# Altium PCB DS130-1.02 G-M传感器.PcbDoc
Units mil, origin at the board's own origin, x right, y up, seen from the top; angles counter-clockwise.
Board outline 1614.17 x 2519.69 mil, 2 copper layers (Top Layer, Bottom Layer), stack 62.249 mil thick; 52 components, 35 nets, 200 pads, 44 vias.
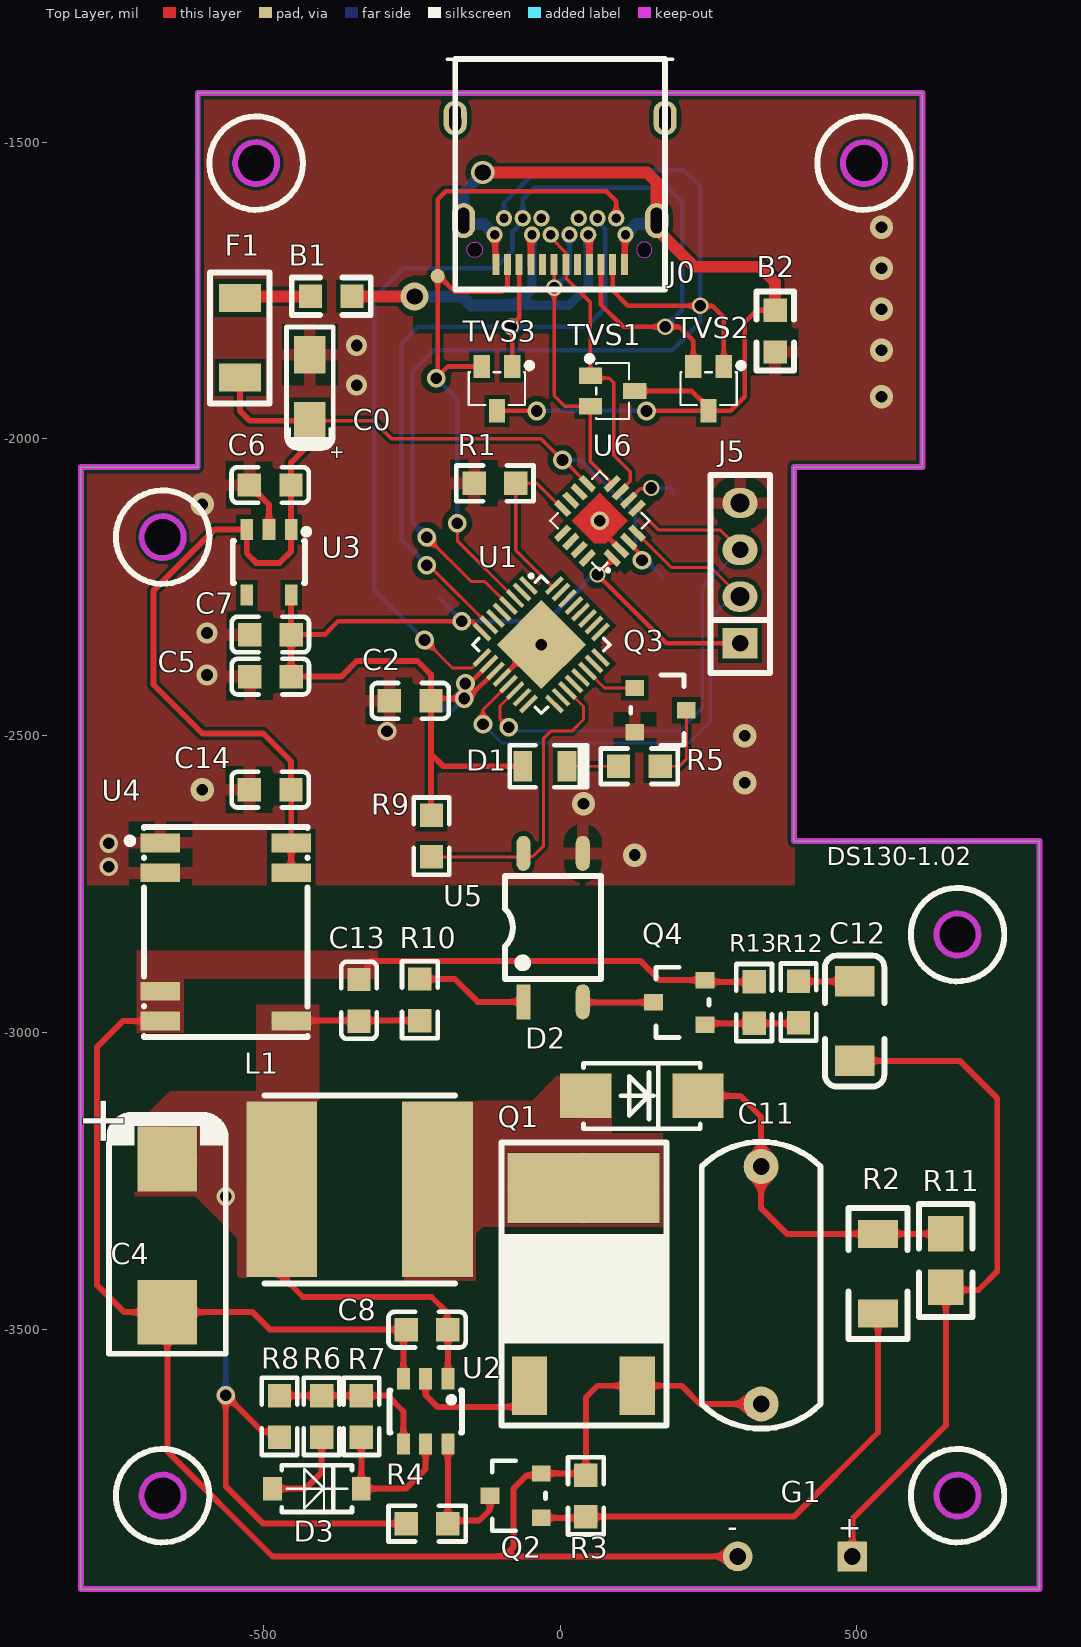
[diagram p0: Top Layer view]
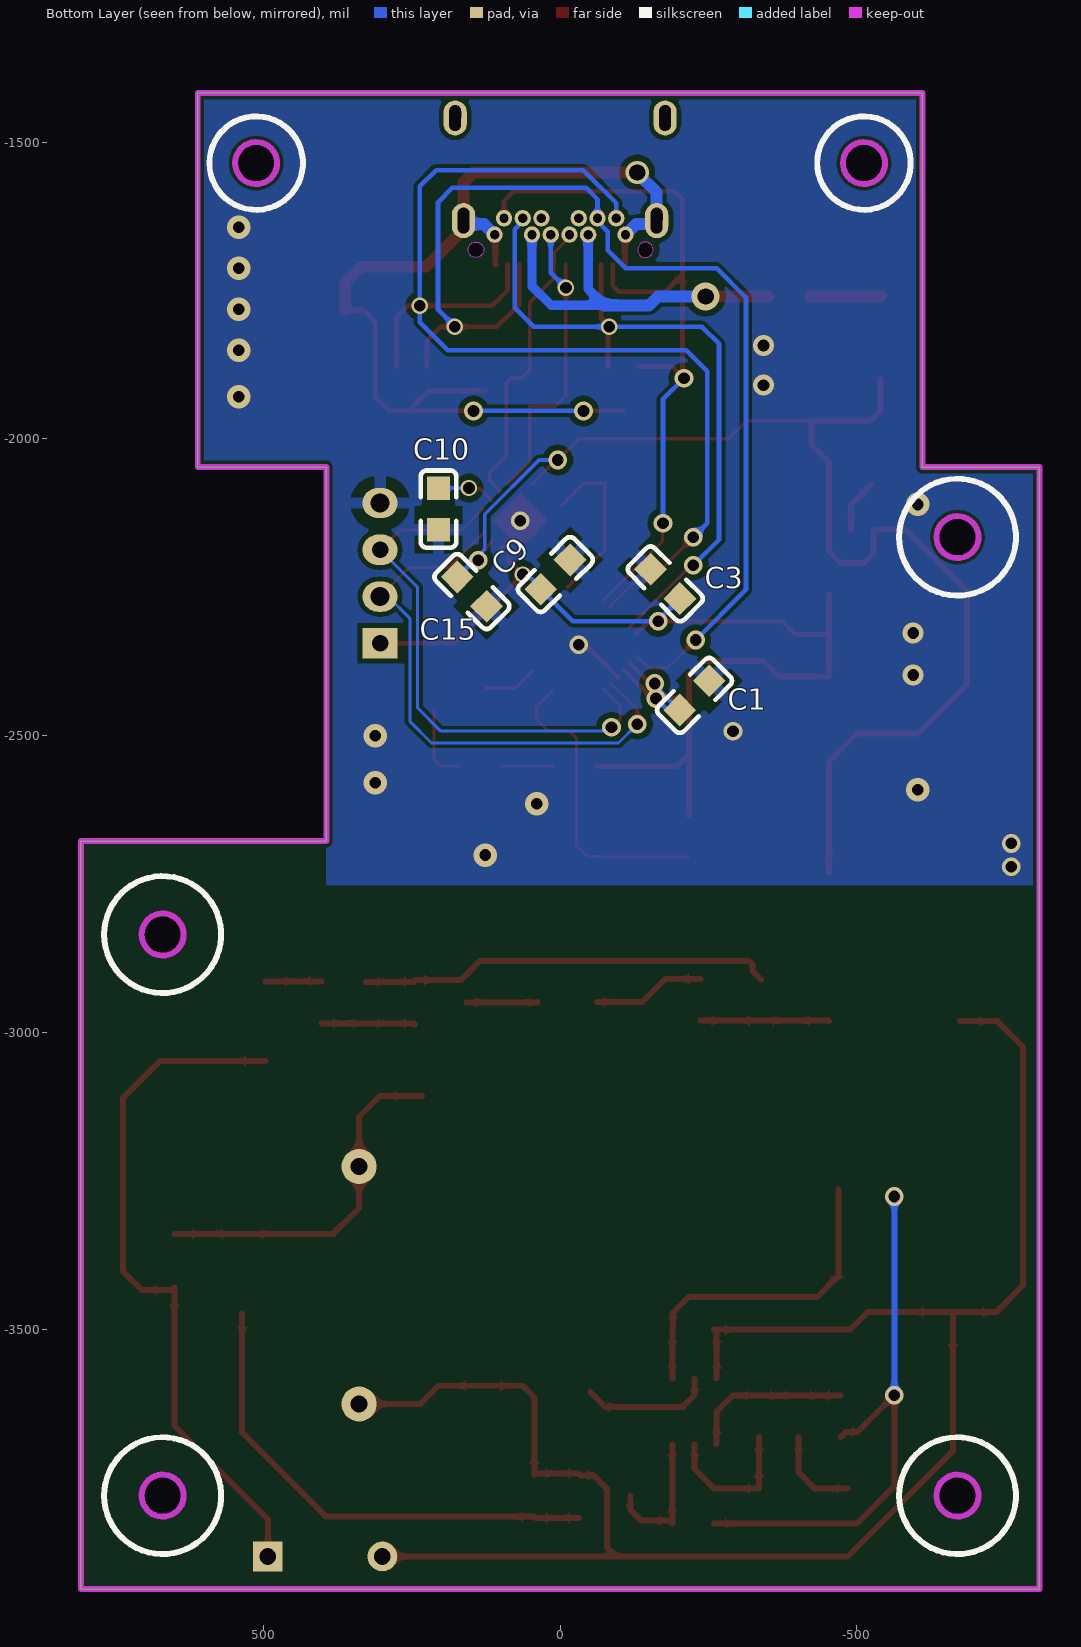
[diagram p1: Bottom Layer view, seen from below]

## Layer stack, top to bottom
Top Solder: solder mask 0.4, Solder Resist, Dk 3.5
Top Layer: signal copper 1.4
Dielectric 1: dielectric 59.4488, FR-4, Dk 4.8
Bottom Layer: signal copper 1.4
Bottom Solder: solder mask 0.4, Solder Resist, Dk 3.5

## Board outline
-807.09,-3937.01 -807.09,-2047.24 -610.24,-2047.24 -610.24,-1417.32 610.24,-1417.32 610.24,-2047.24 393.7,-2047.24 393.7,-2677.17 807.09,-2677.17 807.09,-3937.01
cut-out: -704.72,-2165.35 ccw(c-669.29,-2165.35) -669.29,-2200.79 ccw(c-669.29,-2165.35) -633.86,-2165.35 ccw(c-669.29,-2165.35) -669.29,-2129.92 ccw(c-669.29,-2165.35)
cut-out: 633.86,-3779.53 ccw(c669.29,-3779.53) 669.29,-3814.96 ccw(c669.29,-3779.53) 704.72,-3779.53 ccw(c669.29,-3779.53) 669.29,-3744.09 ccw(c669.29,-3779.53)
cut-out: -704.72,-3779.53 ccw(c-669.29,-3779.53) -669.29,-3814.96 ccw(c-669.29,-3779.53) -633.86,-3779.53 ccw(c-669.29,-3779.53) -669.29,-3744.09 ccw(c-669.29,-3779.53)
cut-out: 633.86,-2834.65 ccw(c669.29,-2834.65) 669.29,-2870.08 ccw(c669.29,-2834.65) 704.72,-2834.65 ccw(c669.29,-2834.65) 669.29,-2799.21 ccw(c669.29,-2834.65)
cut-out: 476.38,-1535.43 ccw(c511.81,-1535.43) 511.81,-1570.87 ccw(c511.81,-1535.43) 547.24,-1535.43 ccw(c511.81,-1535.43) 511.81,-1500 ccw(c511.81,-1535.43)
cut-out: -547.24,-1535.43 ccw(c-511.81,-1535.43) -511.81,-1570.87 ccw(c-511.81,-1535.43) -476.38,-1535.43 ccw(c-511.81,-1535.43) -511.81,-1500 ccw(c-511.81,-1535.43)

## Design rules (kind name [scope] priority, off if disabled: settings)
Clearance [All] p1: gap=7.87 ignorepadtopadclearanceinfootprint=FALSE except(0: Arc-Hole Track-Hole SMDPad-Hole THPad-Hole Via-Hole Fill-Hole Poly-Hole Region-Hole Text-Hole; 3.94: THPad-THPad; 5.91: Arc-SMDPad Arc-THPad Arc-Fill Arc-Poly Arc-Region Track-SMDPad Track-THPad Track-Fill Track-Poly Track-Region SMDPad-SMDPad; 10: THPad-Via Via-Fill Via-Poly Via-Region Fill-Fill Fill-Poly Fill-Region Poly-Poly Poly-Region Region-Region)
MinimumSolderMaskSliver [All] p1: minsoldermaskwidth=7.87
PlaneConnect [All] p1: planeconnectstyle=Relief reliefexpansion=20 reliefentries=4 reliefconductorwidth=10 reliefairgap=20
PolygonConnect PGND [InNet('PGND') vs InNet('PGND')] p1: thpad.connectstyle=Relief thpad.reliefconductorwidth=20 thpad.reliefentries=4 thpad.polygonreliefangle="90 Angle" thpad.airgapwidth=20 smdpad.connectstyle=Relief smdpad.reliefconductorwidth=20 smdpad.reliefentries=4 smdpad.polygonreliefangle="90 Angle" smdpad.airgapwidth=20 via.connectstyle=Direct via.reliefconductorwidth=10 via.reliefentries=4 via.polygonreliefangle="90 Angle" via.airgapwidth=10
PolygonConnect GND [InNet('GND') vs InNet('GND')] p2: thpad.connectstyle=Relief thpad.reliefconductorwidth=20 thpad.reliefentries=4 thpad.polygonreliefangle="90 Angle" thpad.airgapwidth=20 smdpad.connectstyle=Relief smdpad.reliefconductorwidth=20 smdpad.reliefentries=4 smdpad.polygonreliefangle="90 Angle" smdpad.airgapwidth=20 via.connectstyle=Direct via.reliefconductorwidth=10 via.reliefentries=4 via.polygonreliefangle="90 Angle" via.airgapwidth=10
RoutingVias [All] p1: holewidth=15.75 width=31.5 viastyle="Through Hole" minholewidth=7.87 minwidth=15.75 maxholewidth=39.37 maxwidth=78.74
SilkToSilkClearance [All] p1: silktosilkclearance=3.94
SilkToSolderMaskClearance [IsPad] p1: minsilkscreentomaskgap=1.97 clearancetoexposedcopper=TRUE
SolderMaskExpansion [All] p1: expansion=4 istentingtop=FALSE
Width [All] p1: maxlimit=40 minlimit=5 preferedwidth=10 minimp=50.000000 maximp=50.000000 favimp=50.000000
26 further rules are at their usual default settings.

## Components (designator, comment, footprint, x,y, rotation, side; value= is the part's Value field where it differs from the comment)
B1 "CBM160808U102" 0603BEAD -385.39,-1759.84 r180 top
B2 "CBM160808U102" 0603BEAD 362.57,-1818.53 r270 top
C0 "AVX_10uF/16V ±10％(C106)" AVX_3216-18(1206)_SMD -421.26,-1913.78 r90 top value=10uF
C1 "SMDCAP00013" 0603CAP -226.39,-2431.92 r315 bottom value=100nF
C2 "SMDCAP00012" 0603CAP -252.4,-2440.94 r0 top value=4.7uF
C3 "SMDCAP00015" 0603CAP -177.17,-2244.09 r225 bottom value=1uF
C4 "AVX_220uF/16V ±10％(C227)" AVX_7343-31(2917)_SMD -661.42,-3339.37 r270 top value=220uF
C5 "SMDCAP00013" 0603CAP -487.88,-2400.31 r0 top value=100nF
C6 "SMDCAP00015" 0603CAP -488.27,-2077.47 r0 top value=1uF
C7 "SMDCAP00015" 0603CAP -487.88,-2329.44 r0 top value=1uF
C8 "SMDCAP00013" 0603CAP -224.02,-3500 r0 top value=100nF
C9 "SMDCAP00015" 0603CAP 7.87,-2228.35 r135 bottom value=1uF
C10 "SMDCAP00013" 0603CAP 204.72,-2118.11 r90 bottom value=100nF
C11 "DIPCAP03003" DIP_CL_10.16mm 338.58,-3425.2 r270 top value=100nF
C12 "MLCC 47pF 1kV ±5％ 1206" 1206CAP 496.06,-2980.31 r90 top value=47pF
C13 "SMDCAP00016" 0603CAP -338.58,-2945.28 r270 top value=10uF
C14 "SMDCAP00012" 0603CAP -488.19,-2590.55 r0 top value=4.7uF
C15 "SMDCAP00015" 0603CAP 148.45,-2257.06 r45 bottom value=1uF
D1 "SMDLED00010" LED_0805 -25.59,-2551.18 r0 top value=BLUE
D2 "US1M-DO-214AC" SMA/DO-214AC 137.8,-3106.3 r0 top value=US1M
D3 "DIPDIODE02001" SOD-123 -409.45,-3767.72 r0 top value=1N4148
F1 "SMD1206-050C-16V" 1206FUSE -539.37,-1829.84 r270 top value="16V /0.5A"
G1 "M4011盖革管" M4011-90 944.88,-4429.13 r0 top
J0 "USB_Type_C_24P" USB_TYPE_C_24P_Receptacle 0,-1582.68 r180 top locked
J5 "DIP4单排直针  间距2mm 针长11mm 铜" H4 303.15,-2344.16 r90 top value=4P
L1 "SMD_220uH 8.0*8.0" IND-SMD_L8.0-W8.0 -333.03,-3267.44 r0 top value=220uH
Q1 "XKT-1050" TO-252 39.37,-3476.38 r270 top
Q2 "MMBTA44" SOT23 -74.8,-3779.53 r90 top value=MMBTA44-400V
Q3 "SMDIC000037" SOT23 169.29,-2456.69 r270 top value=DTC114ECA
Q4 "MMBT3904" SOT23 200.79,-2948.82 r90 top value=MMBT3904-40V
R1 "Chip 4.7K 1/16W ±1％ 0603" 0603RES -109.8,-2074.8 r0 top value=4.7K
R2 "Chip 4.7M 1/4W ±1％ 1206 500V" 1206RES 535.43,-3405.51 r90 top value=4.7M
R3 "Chip 5.49K 1/10W ±1％ 0603" 0603RES 43.31,-3779.96 r270 top value=5.49K
R4 "SMDRES00058" 0603RES -223.98,-3826.77 r180 top value=20K
R5 "SMDRES00030" 0603RES 133.43,-2551.18 r0 top value=510R
R6 "SMDRES00058" 0603RES -401.57,-3646.1 r270 top value=20K
R7 "SMDRES00085" 0603RES -334.65,-3646.1 r270 top value=1M
R8 "SMDRES00075" 0603RES -472.44,-3646.1 r90 top value=200K
R9 "Chip 4.7K 1/16W ±1％ 0603" 0603RES -216.54,-2668.86 r90 top value=4.7K
R10 "SMDRES00042" 0603RES -236.22,-2944.45 r90 top value=2K
R11 "Chip 1M 1/10W ±1％ 0805 400V" 0805RES 649.61,-3383.58 r90 top value=1M
R12 "SMDRES00108" 0603RES 401.57,-2948.39 r270 top value=22K
R13 "SMDRES00071" 0603RES 326.77,-2949.25 r270 top value=100K
TVS1 "TPD2E2U06DCKR" SC-70-3_L2.0-W1.3-P0.65-LS2.1-BL 88.58,-1919.28 r270 top
TVS2 "TPD2E2U06DCKR" SC-70-3_L2.0-W1.3-P0.65-LS2.1-BL 249.99,-1915.35 r180 top
TVS3 "TPD2E2U06DCKR" SC-70-3_L2.0-W1.3-P0.65-LS2.1-BL -106.3,-1915.35 r180 top
U1 "STC32G12K128_35I QFN32" QFN-32-L4.0-W4.0 -31.5,-2346.46 r315 top value=STC32G12K128
U2 "XKT-203" SOT23-6 -226.38,-3637.79 r180 top
U3 "ME6211C33M5G-N" SOT23-5 -490.24,-2207.39 r180 top
U4 "B0505MT-1WR4" DFN-14_7P_L9.0-W7.0-P1.27-BL_B0505MT-1WR4 -673.23,-2680.31 r270 top
U5 "EL357N" SO-4 -11.81,-2822.83 r90 top
U6 "CH343P" QFN-16_L3_W3 66.93,-2137.8 r45 top

## Footprints (in the part's own frame and the unit in brackets; to place one, negate y for a bottom-side part, rotate by r counter-clockwise, add the part's x,y. Pads: shape width x height; smd on the part's side, far side on the other; paste and mask are expansions set on the pad)
0603BEAD [mm]
  rect 1x1 smd: 1(-0.889,0) 2(0.889,0)
  silkscreen extent -1.69,-0.8 1.69,0.8, body extent -0.9,-0.48 0.85,0.48, height 0.95
0603CAP [mm]
  rect 1x1 smd: 1(-0.889,0) 2(0.89,0)
  silkscreen extent -1.65,-0.76 1.65,0.76, body extent -0.8,-0.4 0.8,0.4, height 0.3
0603RES [mm]
  rect 1x1 smd: 1(-0.889,0) 2(0.889,0)
  silkscreen extent -1.65,-0.76 1.65,0.76, body extent -0.8,-0.41 0.8,0.41, height 0.51
0805RES [mil]
  rect 60x60 smd: 1(-45,0) 2(45,0)
  silkscreen extent -95,-45 95,45, body extent -55,-25 55,25, height 32
1206CAP [mm]
  rect 1.3x1.7 smd: 1(-1.7,0) 2(1.7,0)
  silkscreen extent -2.8,-1.27 2.8,1.27, body extent -1.7,-0.9 1.7,0.9, height 1.8
1206FUSE [mm]
  rect 1.2x1.8 smd: 1(-1.7,0) 2(1.7,0)
  silkscreen extent -2.8,-1.27 2.8,1.27, body extent -1.6,-0.83 1.6,0.83, height 1.46
1206RES [mm]
  rect 1.2x1.7 smd: 1(-1.7,0) 2(1.7,0)
  silkscreen extent -2.8,-1.27 2.8,1.27, body extent -1.6,-0.8 1.57,0.75, height 0.61
AVX_3216-18(1206)_SMD [mm]
  rect 1.6x1.35 smd: 1(-1.41,0) 2(1.41,0)
  silkscreen extent -2.6,-1 2.6,1, body extent -1.7,-0.84 1.7,0.84, height 1.71
AVX_7343-31(2917)_SMD [mm]
  rect 2.77x2.55 smd: 1(-3.22,0) 2(3.33,0)
  silkscreen extent -5.11,-2.5 5.11,2.5, body extent -3.7,-2.22 3.7,2.22, height 3.01
DFN-14_7P_L9.0-W7.0-P1.27-BL_B0505MT-1WR4 [mm]
  rect 0.8x1.7 smd paste+0.051: 1(0,0) 2(1.27,0) 6(6.35,0) 7(7.62,0) 8(7.62,5.6) 13(1.27,5.6) 14(0,5.6)
  silkscreen extent -0.69,-1.44 8.31,6.3
DIP_CL_10.16mm [mm]
  round 1.5 hole 0.711: 1(-5.08,0) 2(5.08,0)
  silkscreen extent -6.13,-2.54 6.13,2.54, body extent -6.13,-2.54 6.13,2.54, height 8
H4 [mm]
  rect 1.3x1.5 hole 0.7: 1(0,0)
  oval 1.3x1.5 hole 0.813: 2(2,0) 4(6,0)
  oval 1.3x1.5 hole 0.7: 3(4,0)
  silkscreen extent -1.27,-1.27 7.2,1.27, body extent -0.97,-1 6.98,1, height 6
IND-SMD_L8.0-W8.0 [mm]
  rect 3.024x7.5 smd: 1(3.215,0.093) 2(-3.441,0.093)
  silkscreen extent -4.19,-3.93 3.96,4.11
LED_0805 [mm]
  rect 0.8x1.3 smd: 1(-0.95,0) 2(0.95,0)
  silkscreen extent -1.5,-0.9 1.8,0.9, body extent -1,-0.45 1.06,0.45, height 0.85
M4011-90 [mm]
  rect 1.27x1.27 hole 0.711 paste+0 mask+0.102: 1(-11.5,13.9)
  round 1.27 hole 0.711 paste+0 mask+0.102: 2(-16.4,13.9)
QFN-16_L3_W3 [mm]
  rect 0.28x0.8 smd paste-100 mask+0.051: 1(-0.749,-1.5) 2(-0.249,-1.5) 3(0.249,-1.5) 4(0.749,-1.5) 9(0.749,1.5) 10(0.249,1.5) 11(-0.249,1.5) 12(-0.749,1.5)
  rect 0.8x0.28 smd paste-100 mask+0.051: 5(1.5,-0.749) 6(1.5,-0.249) 7(1.5,0.249) 8(1.5,0.749) 13(-1.5,0.749) 14(-1.5,0.249) 15(-1.5,-0.249) 16(-1.5,-0.749)
  round 0.34 smd: 17(0,0)
  Top Layer region: -0.85,-0.5 -0.85,0.85 0.85,0.85 0.85,-0.85 -0.5,-0.85 -0.85,-0.5
  silkscreen extent -1.5,-1.76 1.5,1.5
QFN-32-L4.0-W4.0 [mm]
  rect 0.96x0.2 smd paste-100 mask+0.051: 1(-2.18,1.4) 2(-2.18,1) 3(-2.18,0.6) 4(-2.18,0.2) 5(-2.18,-0.2) 6(-2.18,-0.6) 7(-2.18,-1) 8(-2.18,-1.4) 17(2.18,-1.4) 18(2.18,-1) 19(2.18,-0.6) 20(2.18,-0.2) 21(2.18,0.2) 22(2.18,0.6) 23(2.18,1) 24(2.18,1.4)
  rect 0.2x0.96 smd paste-100 mask+0.051: 9(-1.4,-2.18) 10(-1,-2.18) 11(-0.6,-2.18) 12(-0.2,-2.18) 13(0.2,-2.18) 14(0.6,-2.18) 15(1,-2.18) 16(1.4,-2.18) 25(1.4,2.18) 26(1,2.18) 27(0.6,2.18) 28(0.2,2.18) 29(-0.2,2.18) 30(-0.6,2.18) 31(-1,2.18) 32(-1.4,2.18)
  rect 2.7x2.7 smd paste-100 mask+0.051: 33(0,0)
  silkscreen extent -2.46,-2.08 2.08,2.08
SC-70-3_L2.0-W1.3-P0.65-LS2.1-BL [mm]
  rect 0.7x1 smd paste+0.051: 1(-0.65,-0.95) 2(0.65,-0.95) 3(0,0.95)
  silkscreen extent -1.63,-1.23 1.2,0.7
SMA/DO-214AC [mm]
  rect 2.2x1.9 smd: 1(-2.4,0) 2(2.4,0)
  silkscreen extent -2.5,-1.4 2.5,1.4, body extent -2.74,-1.4 2.74,1.4, height 2.28
SO-4 [mm]
  rect 1.5x0.6 smd mask+0: 1(-3.175,1.27)
  oval 1.5x0.6 smd mask+0: 2(-3.175,-1.27) 3(3.175,-1.27) 4(3.175,1.27)
  silkscreen extent -2.2,-2.05 2.2,2.05, body extent -3.34,-2.47 3.34,2.48, height 2.9
SOD-123 [mm]
  rect 0.8x1 smd: 1(-1.9,0) 2(1.9,0)
  silkscreen extent -1.5,-1 1.5,1, body extent -1.95,-0.9 1.95,0.9, height 1.18
SOT23 [mm]
  rect 0.7x0.8 smd: 1(-0.95,-1.1) 2(0.95,-1.1) 3(0,1.1)
  silkscreen extent -1.5,-1.27 1.5,1, body extent -1.46,-1.17 1.46,1.17, height 1
SOT23-5 [mm] "SOT-23/SC-74A; 5 Leads; Body 3.1 x 3 mm, inc. leads (LxW max)"
  rect 0.55x0.9 smd: 1(-0.95,-1.4) 2(0,-1.4) 3(0.95,-1.4) 4(0.95,1.4) 5(-0.95,1.4)
  silkscreen extent -1.7,-1.4 1.55,0.9, body extent -1.45,-1.4 1.45,1.4, height 1.45
SOT23-6 [mm] "SOT-23/SC-74A; 5 Leads; Body 3.1 x 3 mm, inc. leads (LxW max)"
  rect 0.55x0.9 smd: 1(-0.95,-1.4) 2(0,-1.4) 3(0.95,-1.4) 4(0.95,1.4) 5(0,1.4) 6(-0.95,1.4)
  silkscreen extent -1.55,-0.9 1.55,0.9, body extent -1.45,-1.4 1.45,1.4, height 1.45
TO-252 [mm]
  rect 2.5x1.5 smd: 1(3,-2.3) 3(3,2.3)
  rect 3x6.5 smd: 2(-5.46,0)
  silkscreen extent -7.4,-3.5 4.7,3.55, body extent -6.17,-3.29 3.53,3.29, height 2.3
USB_TYPE_C_24P_Receptacle [mm]
  oval 1x1.5 hole 0.5 slot 1.1 at 90.5 deg: 0(-4.49,-3.13) 0(-4.13,1.26) 0(4.13,1.26) 0(4.49,-3.13)
  rect 0.3x0.9 smd mask+0.1: A1(-2.75,3.13) A2(-2.25,3.13) A3(-1.75,3.13) A4(-1.25,3.13) A5(-0.75,3.13) A6(-0.25,3.13) A7(0.25,3.13) A8(0.75,3.13) A9(1.25,3.13) A10(1.75,3.13) A11(2.25,3.13) A12(2.75,3.13)
  round 0.7 hole 0.4: B1(2.8,1.86) B2(2.4,1.16) B3(1.6,1.16) B4(1.2,1.86) B5(0.8,1.16) B6(0.4,1.86) B7(-0.4,1.86) B8(-0.8,1.16) B9(-1.2,1.86) B10(-1.6,1.16) B11(-2.4,1.16) B12(-2.8,1.86)
  Keep-Out Layer board cut-out: 3.98,2.51 3.955,2.384 3.883,2.277 3.776,2.205 3.65,2.18 3.65,2.18 3.524,2.205 3.417,2.277 3.345,2.384 3.32,2.51 3.32,2.51 3.345,2.636 3.417,2.743 3.524,2.815 3.65,2.84 3.65,2.84 3.776,2.815 3.883,2.743 3.955,2.636 3.98,2.51
  Keep-Out Layer board cut-out: -3.93,2.51 -3.905,2.384 -3.833,2.277 -3.726,2.205 -3.6,2.18 -3.6,2.18 -3.474,2.205 -3.367,2.277 -3.295,2.384 -3.27,2.51 -3.27,2.51 -3.295,2.636 -3.367,2.743 -3.474,2.815 -3.6,2.84 -3.6,2.84 -3.726,2.815 -3.833,2.743 -3.905,2.636 -3.93,2.51
  silkscreen extent -4.48,-5.66 4.48,4.21, body extent -4.87,-5.66 4.88,4.21, height 3.36

## Part data
B1 B2: library part "Chip Ferrite Bead 0606", "贴片磁珠"
C0 C4: "钽电容"
C1 C5 C8 C10: library part "MLCC 100nF 50V ±10％ 0603", "贴片电容"
C2 C14: library part "MLCC 4.7uF 50V ±10％ 0603", "贴片电容"
C3 C6 C7 C9 C15: library part "MLCC 1uF 50V ±10％ 0603", "贴片电容"
C11: library part "CBB22 100nF 630VDC ±5％ DIP2", "插件涤纶电容"
C12: "贴片电容"
C13: library part "MLCC 10uF 50V ±10％ 0603", "贴片电容"
D1: library part "Chip 蓝色LED 0805", "贴片LED"
D2: "快恢复/高效率二极管"
D3: library part 1N4148W, "贴片开关二极管 T4"
F1: "贴片自恢复保险丝 16V /0.5A"
J5: "单排直针"
Q1: "NMOS"
Q2 Q4: "BJT"
Q3: library part "DTC114ECA SOT-23 长电", "数字晶体管"
R1 R2 R3 R9 R11: "贴片电阻"
R4 R6: library part "Chip 20K 1/16W ±1％ 0603", "贴片电阻"
R5: library part "Chip 510R 1/16W ±1％ 0603", "贴片电阻"
R7: library part "Chip 1M 1/16W ±1％ 0603", "贴片电阻"
R8: library part "Chip 200K 1/16W ±1％ 0603", "贴片电阻"
R10: library part "Chip 2K 1/16W ±1％ 0603", "贴片电阻"
R12: library part "Chip 22K 1/16W ±1％ 0603", "贴片电阻"
R13: library part "Chip 100K 1/16W ±1％ 0603", "贴片电阻"
U1: "单片机芯片"
U3: "稳压芯片"
U5: "光耦"

## Free pads (board coordinates)
  round 23.62 smd mask+4: 3(-206.1,-1725.52)

## Via types
v1: diameter 31.5, hole 19.68, Top Layer to Bottom Layer, tented both sides, 20 vias
v2: diameter 39.37, hole 19.68, Top Layer to Bottom Layer, tented both sides, 11 vias
v3: diameter 27.56, hole 19.68, Top Layer to Bottom Layer, tented both sides, 6 vias
v4: diameter 35.43, hole 19.68, Top Layer to Bottom Layer, tented both sides, 4 vias
v5: diameter 31.5, hole 19.68, Top Layer to Bottom Layer, tented bottom, 1 vias
v6: diameter 39.37, hole 27.56, Top Layer to Bottom Layer, tented both sides, 1 vias
v7: diameter 47.24, hole 27.56, Top Layer to Bottom Layer, tented both sides, 1 vias

## Nets (pads, with @x,y where several pads share a name; then routed paths per layer and width w, separated by ;. In a path a pad name is that pad's centre, name@x,y a point inside that pad or via, vN(x,y) a via of type N, cw(c..) or ccw(c..) an arc to the next point about the centre after c; other vN are vias at no path point)
D+_I/O1: J0.A6 J0.B6 TVS1.1 U6.7 | length 505.8
  Top Layer w5.91: J0.B6 -15.75,-1660.6 9.84,-1686.19 J0.A6 10.65,-1706.71 10.65,-1729.68 51.18,-1770.21 51.18,-1883.84 64.98,-1897.64 82.68,-1897.64 90.55,-1905.51 90.55,-2027.56 118.11,-2055.12 118.11,-2070.87 101.75,-2087.22 U6.7
D-_I/O2: J0.A7 J0.B7 TVS1.2 U6.8 | length 535.2
  Top Layer w5.91: J0.A7 v3(-9.84,-1745.37) -9.84,-1927.16 7.87,-1944.88 TVS1.2 51.18,-2038.54 U6.8
  Bottom Layer w7.87: v3(-9.84,-1745.37) 15.75,-1719.78 J0.B7
GND: B2.2 C0.2 C1.1 C2.1 C3.1 C5.1 C6.1 C7.1 C9.2 C10.1 C14.1 C15.1 J5.4 Q3.2 R1.1 U1.12 U1.33 U3.2 U4.1 U4.2 U5.3 U6.2 U6.17 | length 240.7
  Top Layer w7.87: U1.12 -94.97,-2398.8 -42.63,-2346.46 v5(-31.5,-2346.46) ; v1(66.93,-2137.8) 66.93,-2151.65 U6.2
  Top Layer w10: C6.1 -490.24,-2110.5 U3.2
  other v1: -759.84,-2720.47 -759.84,-2681.1 -291.34,-2492.13
  other v2: 125.98,-2700.79 39.37,-2614.17 -602.36,-2590.55 311.02,-2578.74 311.02,-2500 -602.36,-2110.24 541.34,-1929.13 541.34,-1850.39 541.34,-1781.5 541.34,-1712.6 541.34,-1643.7
  other v4: -594.49,-2397.64 -594.49,-2326.77 -342.52,-1909.45 -342.52,-1842.52
IS_400V: C11.1 D2.2 R2.2 R11.2 | length 603.5
  Top Layer w10: D2.2 303.15,-3106.3 338.58,-3141.73 C11.1 338.58,-3295.28 381.89,-3338.58 R2.2 R11.2
LED1: Q3.1 U1.22 | length 92
  Top Layer w5: U1.22 74.74,-2419.29 Q3.1
NetB1_2: B1.2 F1.1 | length 120.2
  Top Layer w20: F1.1@-540.24,-1758.98 -539.37,-1759.84 B1.2
NetC10_2: C10.2 U6.6 | length 90.7
  Top Layer w5.91: U6.6@115.65,-2102.97 134.64,-2083.98 152.24,-2083.98 v3(153.54,-2082.68)
  Bottom Layer w5.91: v3(153.54,-2082.68) 187.99,-2082.68 190.8,-2085.49 C10.2@190.8,-2091.42
NetC12_1: C12.1 G1.1 R11.1 | length 1177.6
  Top Layer w10: G1.1 492.13,-3818.9 649.61,-3661.42 649.61,-3433.07 R11.1 654.09,-3433.07 704.72,-3433.07 736.22,-3401.57 736.22,-3110.24 673.23,-3047.24 C12.1
NetC12_2: C12.2 R12.1 | length 94.5
  Top Layer w10: R12.1 C12.2
NetD1_2: D1.2 R5.1 | length 86.6
  Top Layer w5: D1.2 R5.1
NetD2_1: D2.1 L1.1 Q1.2
NetD3_1: D3.1 R6.2 | length 153.1
  Top Layer w10: D3.1 -429.13,-3767.72 -401.57,-3740.16 R6.2
NetD3_2: D3.2 R7.2 U2.5 | length 250.1
  Top Layer w10: R7.2 D3.2 -259.84,-3767.72 -226.38,-3734.25 U2.5
NetQ1_1: Q1.1 U2.2 | length 221.8
  Top Layer w10: U2.2 -226.38,-3610.28 -206.74,-3629.92 -75.71,-3629.92 -51.18,-3605.39 Q1.1@-51.18,-3604.72
NetQ2_1: Q2.1 R2.1 R3.2 | length 827.2
  Top Layer w10: Q2.1 41.34,-3816.93 R3.2 393.7,-3814.96 535.43,-3673.23 R2.1
NetQ2_3: Q2.3 R4.1 U2.6 | length 238.1
  Top Layer w10: U2.6 -188.98,-3759.84 R4.1 -183.77,-3821.57 -136.53,-3821.57 -118.11,-3803.15 Q2.3
NetQ3_3: Q3.3 R5.2 | length 131.7
  Top Layer w5: R5.2 200.79,-2551.18 212.6,-2539.37 Q3.3
NetQ4_1: Q4.1 R12.2 R13.2 | length 158.7
  Top Layer w10: Q4.1 246.06,-2984.25 R13.2 400.71,-2984.25 R12.2
NetQ4_3: Q4.3 U5.2 | length 119.7
  Top Layer w10: U5.2 39.17,-2948.82 Q4.3
NetR6_1: R6.1 R7.1 R8.2 U2.4 | length 274.8
  Top Layer w10: R8.2 R6.1 R7.1 -290.47,-3611.1 -263.78,-3637.8 U2.4
NetR9_1: R9.1 U1.19 U5.4 | length 517.6
  Top Layer w5: R9.1 -67.83,-2703.86 -66.89,-2702.91 -45.43,-2702.91 -27.56,-2685.04 -27.56,-2503.94 -15.75,-2492.13 19.69,-2492.13 39.37,-2472.44 39.37,-2450.73 U1.19
NetR10_2: R10.2 U5.1 | length 190.3
  Top Layer w10: R10.2 -177.17,-2909.45 -138.78,-2947.83 U5.1
P3.0/D-/RxD: J5.2 U1.13 U6.4 | length 956.9
  Top Layer w5: v1(-129.92,-2480.31) -129.92,-2456.02 U1.13@-83.84,-2409.94 ; U6.4 187.39,-2216.54 254.27,-2216.54 J5.2
  Bottom Layer w5: v1(-129.92,-2480.31) -98.43,-2511.81 216.54,-2511.81 253.03,-2475.31 253.03,-2302.09 289.7,-2265.41 J5.2
P3.1/D+/TxD: J5.3 U1.14 U6.5 | length 923.4
  Top Layer w5: v1(-86.61,-2485.69) -87.25,-2485.69 -101.3,-2471.64 -101.3,-2449.66 U1.14@-72.7,-2421.06 ; U6.5 166.19,-2153.54 270.02,-2153.54 J5.3
  Bottom Layer w5: v1(-86.61,-2485.69) -81.54,-2490.76 -71.8,-2490.76 -70.44,-2492.13 200.79,-2492.13 240.16,-2452.76 240.16,-2249.67 J5.3
PGND: C4.2 C8.1 C11.2 C13.1 G1.2 Q1.3 Q2.2 Q4.2 R3.1 R13.1 U2.3 U4.6 U4.7 | length 3825.5
  Top Layer w10: U4.7 -736.22,-2980.31 -779.53,-3023.62 -779.53,-3425.2 -734.25,-3470.47 C4.2 ; C13.1 -323.9,-2895.59 -323.9,-2884.72 -318.04,-2878.86 134.76,-2878.86 167.32,-2911.42 Q4.2 246.93,-2914.25 R13.1 ; U2.3 C8.1@-263.78,-3504.76 ; C8.1 -488.19,-3500 -517.72,-3470.47 C4.2 ; G1.2 -94.49,-3881.89 ; C11.2 235.43,-3625.2 204.72,-3594.49 Q1.3 62.99,-3594.49 43.31,-3614.17 R3.1 40.47,-3742.13 Q2.2 -34.73,-3745.36 -56.39,-3745.36 -78.74,-3767.72 -78.74,-3866.14 -94.49,-3881.89 ; C4.2 -661.42,-3704.72 -484.25,-3881.89 -94.49,-3881.89
  Bottom Layer w10: C11.2 C11.2@339.37,-3625.98
Power_5V: C4.1 C8.2 C13.2 L1.2 R4.2 R8.1 R10.1 U2.1 U4.8 | length 1716.6
  Top Layer w10: R8.1 -481.58,-3671.96 -501.27,-3671.96 -535.43,-3637.79 v1(-562.99,-3610.24) -562.99,-3763.78 -500,-3826.77 R4.2 ; L1.2 -468.5,-3409.45 -433.07,-3444.88 -216.54,-3444.88 -190.24,-3471.17 -190.24,-3498.73 C8.2 U2.1 ; U4.8 -451.89,-2979.45 R10.1
  Bottom Layer w10: v1(-562.99,-3610.24) v1(-562.99,-3275.59)
SPI1/SPI2_CS: J0.A3 J0.B3 TVS2.2 U1.9 | length 1898.4
  Top Layer w5: v1(-228.35,-2338.58) -181.1,-2385.83 -148.82,-2385.83 U1.9@-128.38,-2365.39
  Top Layer w7.87: J0.A3 68.9,-1773.62 106.3,-1811.02 v3(177.17,-1811.02) 200.79,-1811.02 224.39,-1834.63 TVS2.2
  Bottom Layer w7.87: v1(-228.35,-2338.58) -312.99,-2253.94 -312.99,-1761.81 -263.78,-1712.6 -110.24,-1712.6 -80,-1682.36 -80,-1650.68 -62.99,-1633.67 J0.B3 -62.99,-1596.5 -43.7,-1577.2 181.3,-1577.2 205.55,-1601.46 205.55,-1782.64 v3(177.17,-1811.02)
SPI1_MISO: J0.A11 J0.B11 pad.3 TVS3.2 U1.3 | length 1322.7
  Top Layer w5: v1(-173.23,-2141.73) -172.47,-2142.49 -172.47,-2172.08 U1.3@-72.7,-2271.85
  Top Layer w7.87: v1(-208.66,-1897.64) v1@-206.1,-1895.08 ; pad.3@-203.61,-1725.52 -177.16,-1751.97 -98.46,-1751.97 -88.58,-1742.09 J0.A11 ; TVS3.2 -188.98,-1877.95 v1@-206.1,-1895.08 ; J0.B11 94.49,-1599.49 77.68,-1582.68 -192.68,-1582.68 -206.1,-1596.1 pad.3 v1@-206.1,-1895.08
  Bottom Layer w7.87: v1(-208.66,-1897.64) -173.23,-1933.07 v1(-173.23,-2141.73)
SPI1_MOSI: J0.A10 J0.B10 TVS3.1 U1.7 | length 1243.9
  Top Layer w5: v1(-224.41,-2212.6) -221.03,-2212.6 U1.7@-117.24,-2316.39
  Top Layer w7.87: TVS3.1 -80.7,-1813 v3(-82.68,-1811.02) -82.68,-1810.35 -68.9,-1796.57 J0.A10
  Bottom Layer w7.87: v1@-224.95,-2212.06 -267.72,-2169.29 -267.72,-1839.87 -238.87,-1811.02 v3(-82.68,-1811.02) 43.98,-1811.02 76.3,-1778.7 76.3,-1646.98 62.99,-1633.67 J0.B10
SPI1_SCK: J0.A2 J0.B2 TVS2.1 U1.4 | length 1948.8
  Top Layer w5: v1(-224.41,-2165.35) -149.61,-2240.16 -126.66,-2240.16 U1.4@-83.84,-2282.99
  Top Layer w7.87: J0.A2 88.58,-1750 114.17,-1775.59 v3(236.22,-1775.59) 236.6,-1775.97 256.28,-1775.97 275.59,-1795.28 TVS2.1
  Bottom Layer w7.87: v1(-224.41,-2165.35) -248.03,-2141.73 -248.03,-1885.83 -212.6,-1850.39 188.98,-1850.39 236.22,-1803.15 v3(236.22,-1775.59) 236.22,-1574.8 208.66,-1547.24 -39.09,-1547.24 -94.49,-1602.64 J0.B2
TNOW: R1.2 U1.32 U6.12 | length 288.3
  Top Layer w5.91: U1.32@-12.57,-2249.58 -55.12,-2207.02 -74.8,-2187.34 R1.2 -39.37,-2074.8 U6.12@-2.38,-2111.79
VBUS: B1.1 J0.A4 J0.A9 J0.B4 J0.B9 | length 733.7
  Top Layer w10: J0.B4@-48.31,-1656.97 J0.B4 ; J0.B9 J0.B9@48.31,-1656.97
  Top Layer w11.81: J0.A9 J0.B4@-49.21,-1657.87 ; J0.A4 J0.B9@49.21,-1657.87
  Top Layer w20: B1.1@-350.39,-1760 v7(-245,-1760)
  Bottom Layer w15.75: J0.B4 -47.24,-1747.24 -75,-1775 15,-1775 47.24,-1742.76 J0.B9
  Bottom Layer w20: v7(-245,-1760) -165,-1760 -150,-1775 -75,-1775
VCC_3V3_MCU: C1.2 C2.2 C3.2 C5.2 C7.2 C9.1 D1.1 J5.1 R9.2 U1.8 U1.10 U1.11 U3.5 U6.1 | length 2110
  Top Layer w7.87: C5.2 -431.8,-2400.31 ; C7.2 -396.37,-2329.44 -374.01,-2307.09 v1(-165.35,-2307.09) -148.81,-2307.09 -147.31,-2308.59 U1.8@-128.38,-2327.53 ; C2.2@-201.61,-2456.69 -211.04,-2447.26 -211.04,-2446.44 -201.61,-2437.01 v1(-161.42,-2437.01) ; U1.10@-117.24,-2376.52 -150.16,-2409.45 -157.48,-2409.45 -159.71,-2411.68 -160.43,-2412.4 -160.43,-2436.02 v1(-161.42,-2437.01) ; U1.11@-106.1,-2387.66 -155.45,-2437.01 v1(-161.42,-2437.01) ; U6.1 88.26,-2200.85 88.26,-2203.08 v3(62.99,-2228.35) 178.8,-2344.16 J5.1
  Top Layer w10: C5.2 U3.5 ; -431.8,-2400.31 -368.81,-2400.31 -342.52,-2374.02 -240.16,-2374.02 -217.36,-2396.81 C2.2 ; R9.2 -217.36,-2633.03 -217.36,-2530.67 ; C2.2@-211.04,-2447.26 C2.2 ; D1.1 -196.85,-2551.18 -217.36,-2530.67 ; -217.36,-2530.67 C2.2
  Bottom Layer w7.87: C3.2 -165.35,-2305.46 v1(-165.35,-2307.09) -21.37,-2307.09 C9.1@41.33,-2244.38 ; C1.2 C1.2@-200.79,-2456.69 ; v1(-161.42,-2437.01) -161.55,-2437.01 -181.24,-2456.69 C1.2@-200.79,-2456.69 ; v1(-159.45,-2411.95) -159.45,-2415.35 C1.2@-200.79,-2456.69 ; C9.1@16.87,-2260.97 C9.1@22.5,-2260.97 ; C9.1@40.21,-2243.26 47.24,-2236.22
VCC_5V: C0.1 C6.2 C14.2 C15.2 F1.2 U3.1 U3.3 U4.13 U4.14 U6.3 U6.9 | length 2210.1
  Top Layer w5.91: C0.1 -314.17,-1969.29 -283.46,-2000 -31.5,-2000 v1(3.94,-2035.43) ; v1@6.29,-2035.43 U6.9 ; U6.3 115.62,-2174.68 138.01,-2197.07 v1(138.01,-2204.1)
  Top Layer w10: F1.2@-539.37,-1899.84 -539.37,-1952.76 -522.83,-1969.29 C0.1 -423.31,-1971.35 -423.31,-2009.93 -453.23,-2039.85 C6.2 -452.84,-2077.86 -452.84,-2189.06 -472.44,-2208.66 -511.81,-2208.66 -527.64,-2192.83 U3.3 -581.41,-2152.27 -685.04,-2255.91 -685.04,-2413.39 -602.36,-2496.06 -500,-2496.06 -453.15,-2542.91 C14.2 ; U4.13 U4.14 C14.2@-452.75,-2590.94
  Bottom Layer w5.91: v1@5.11,-2035.43 35.43,-2035.43 126.99,-2126.99 126.99,-2186.04 v1@141.53,-2200.59 ; v1(138.01,-2204.1) 138.42,-2204.1 141.73,-2200.79 C15.2
VSS: B2.1 J0.0@162.6,-1632.28 J0.0@-162.6,-1632.28 J0.A1 J0.A12 J0.B1 J0.B12 TVS1.3 TVS2.3 TVS3.3 | length 1735.5
  Top Layer w7.87: TVS3.3 v1(-39.37,-1952.76) ; TVS1.3 221.89,-1919.27 239.63,-1937 240.16,-1937 250,-1946.85 TVS2.3 ; v1(145.67,-1952.76) 216.53,-1952.76 233.27,-1952.75 TVS2.3 ; B2.1@362.21,-1783.17 331.01,-1783.17 311.02,-1803.15 311.02,-1929.13 287.4,-1952.75 TVS2.3
  Top Layer w10: J0.B1 -109.17,-1656.97 -109.17,-1705 J0.A12 ; J0.A1 109.17,-1705 109.17,-1656.97 J0.B12
  Top Layer w20: v6(-130,-1551.18) 146.18,-1551.18 162.6,-1567.6 162.6,-1632.28 162.6,-1646.85 225.75,-1710 335.99,-1710 362.21,-1736.22 B2.1@362.21,-1783.17
  Bottom Layer w7.87: v1(-39.37,-1952.76) v1(145.67,-1952.76)
  Bottom Layer w20: v6(-130,-1551.18) -130,-1552.31 -162.6,-1584.91 -162.6,-1632.28 -156.91,-1637.97 -128.17,-1637.97 J0.B1 ; J0.B12 128.18,-1637.97 158.81,-1637.97 J0.0@162.32,-1634.45
pads on no net: J0.0@176.77,-1459.45 J0.0@-176.77,-1459.45 J0.A5 J0.A8 J0.B5 J0.B8 U1.1 U1.2 U1.5 U1.6 U1.15 U1.16 U1.17 U1.18 U1.20 U1.21 U1.23 U1.24 U1.25 U1.26 U1.27 U1.28 U1.29 U1.30 U1.31 U3.4 U6.10 U6.11 U6.13 U6.14 U6.15 U6.16

## Polygon pours and split planes (outlines as drawn)
GND on Top Layer "NONET_L-01_P-001" (solid, remove dead copper, pour order 1): -609.02,-1418.71 611.45,-1418.71 611.45,-2048.63 394.92,-2048.63 394.92,-2751.97 -805.87,-2751.97 -805.87,-2048.63 -609.02,-2048.63
NetD2_1 on Top Layer "NONET_L-01_P-001" (solid, remove dead copper, pour order 6): -267.72,-3114.17 -47.24,-3114.17 0,-3066.93 86.61,-3066.93 86.61,-3169.29 173.23,-3169.29 173.23,-3326.77 -129.92,-3326.77 -141.73,-3338.58 -141.73,-3417.32 -271.65,-3417.32 -267.72,-3413.39
PGND on Top Layer "NONET_L-01_P-001" (solid, remove dead copper, pour order 7): -712.6,-3000 -633.86,-3000 -633.86,-2909.45 -307.09,-2909.45 -307.09,-2862.2 -539.37,-2862.2 -712.6,-2862.2
Power_5V on Top Layer "NONET_L-01_P-001" (solid, remove dead copper, pour order 5): -405.51,-3409.45 -409.45,-3413.39 -543.31,-3413.39 -543.31,-3346.46 -614.17,-3275.59 -716.54,-3275.59 -716.54,-3157.48 -657.48,-3098.43 -511.81,-3098.43 -511.81,-2952.76 -405.51,-2952.76 -405.51,-3413.39 -543.31,-3413.39
GND on Bottom Layer "NONET_L-01_P-001" (solid, remove dead copper, pour order 0): -610.24,-1417.32 610.24,-1417.32 610.24,-2047.24 393.7,-2047.24 393.7,-2751.97 -807.09,-2751.97 -807.09,-2047.24 -610.24,-2047.24

## Keep-outs
Keep-Out Layer:
  circle w10: c-669.29,-3779.53 r35.43
  circle w10: c669.29,-3779.53 r35.43
  circle w10: c-669.29,-2165.35 r35.43
  circle w10: c511.81,-1535.43 r35.43
  circle w10: c-511.81,-1535.43 r35.43
  circle w10: c669.29,-2834.65 r35.43
  lines w10: -807.09,-3937.01 -472.44,-3937.01 472.44,-3937.01 807.09,-3937.01 807.09,-2677.17 393.7,-2677.17 393.7,-2047.24 610.24,-2047.24 610.24,-1417.32 -610.24,-1417.32 -610.24,-2047.24 -807.09,-2047.24 -807.09,-3937.01

## Other copper
Top Layer:
  pour cut-out: -248.03,-1724.41 196.85,-1724.41 196.85,-1822.83 -248.03,-1822.83

## Silkscreen, mask and mechanical layers (free items; w line width, h text height)
Top Overlay:
  circle w10: c669.29,-2834.65 r78.74
  circle w10: c-511.81,-1535.43 r78.74
  circle w10: c511.81,-1535.43 r78.74
  circle w10: c-669.29,-2165.35 r78.74
  circle w10: c669.29,-3779.53 r78.74
  circle w10: c-669.29,-3779.53 r78.74
  lines w5.91: -190,-1360.24 190,-1360.24
  text "DS130-1.02" at 448.82,-2728.35 h51.18
Bottom Overlay:
  circle w10: c669.29,-2834.65 r98.43
  circle w10: c-511.81,-1535.43 r78.74
  circle w10: c511.81,-1535.43 r78.74
  circle w10: c-669.29,-2165.35 r98.43
  circle w10: c669.29,-3779.53 r98.43
  circle w10: c-669.29,-3779.53 r98.43
Mechanical 1:
  circle w10: c669.29,-2834.65 r35.43
  circle w10: c-511.81,-1535.43 r35.43
  circle w10: c511.81,-1535.43 r35.43
  circle w10: c-669.29,-2165.35 r35.43
  circle w10: c669.29,-3779.53 r35.43
  circle w10: c-669.29,-3779.53 r35.43
  lines w10: -807.09,-3937.01 -472.44,-3937.01 472.44,-3937.01 807.09,-3937.01 807.09,-2677.17 393.7,-2677.17 393.7,-2047.24 610.24,-2047.24 610.24,-1417.32 -610.24,-1417.32 -610.24,-2047.24 -807.09,-2047.24 -807.09,-3937.01
Mechanical 15:
  circle w10: c0,-2814.96 r23.62
  circle w10: c-23.62,-2547.24 r23.62
  circle w10: c0,-2185.04 r59.06
  lines w20: -629.92,-2007.87 629.92,-2007.87

## Text inside footprints (layer, text, board x,y; h text height)
C0: Top Overlay "+" at -358.27,-2035.83 h39.37 r90
C4: Top Overlay "+" at -803.15,-3103.15 h78.74 r270
G1: Top Overlay "+" at 507.87,-3807.09 h60 r180; Top Overlay "-" at 299.21,-3811.02 h60 r180